# EAGLE board Tiny2313-1 (EAGLE 5.00)
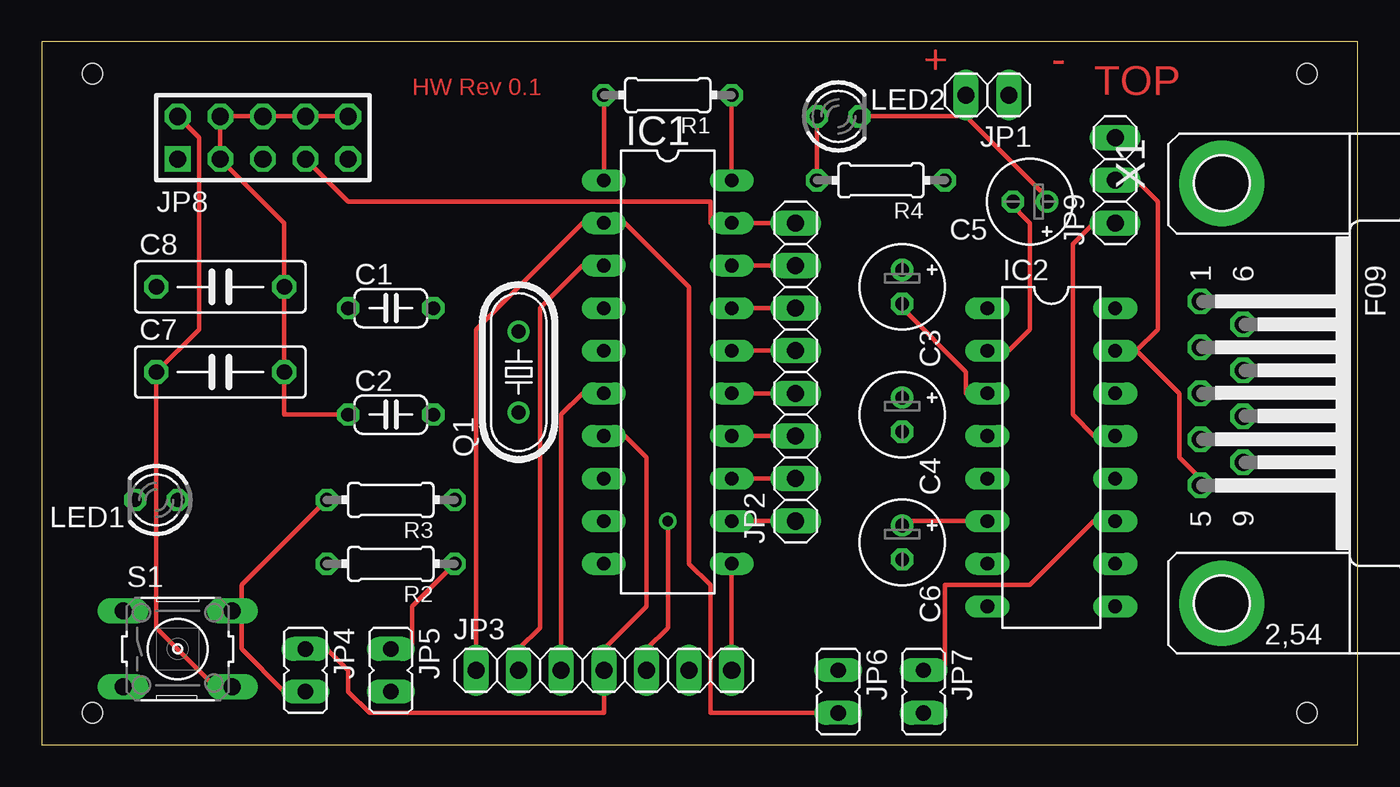
[diagram p0: board, top side]
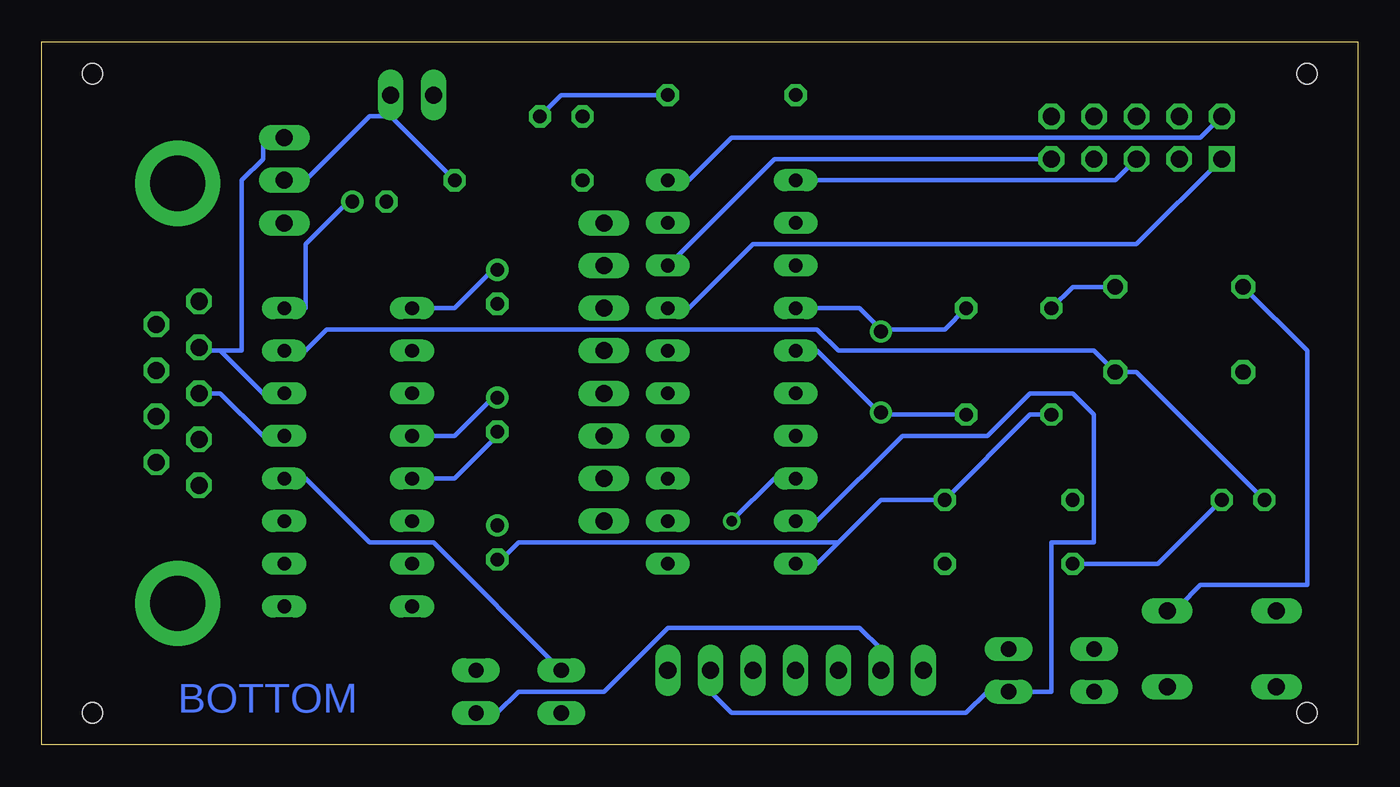
[diagram p1: board, bottom side, seen from below]

Size 78.41 x 41.9 mm. Coordinates in mm from the lower left corner, seen from the top.
Outline: 0,0 78.41,0 78.41,41.9 0,41.9 0,0
Copper layers (1*16): Top 0.035mm / dielectric 1.5mm / Bottom 0.035mm
Design rules "default": minimum track width 10mil, minimum drill 24mil, track to track 8mil, track to pad 8mil, pad to pad 8mil, via to via 8mil, smd to smd 8mil, copper to edge 40mil, drill to drill 8mil, minimum pad ring 10mil, minimum via ring 8mil, stop-mask expansion 4mil, vias tented up to drill 0mil, thermal gap 10mil
Holes 1.2 mm at 3.01,40 3.01,1.9 75.4,1.9 75.4,40

## Footprints (pad centres in the part's own frame; a part is rotated, then mirrored left to right if it is on the bottom)
C050-024X044 = drill 0.813 octagon: 1 -2.54,0; 2 2.54,0
E2-5 = drill 0.813 pad 1.27 round: + -1.016,0 | drill 0.813 pad 1.27 octagon: - 1.016,0
C075-032X103 = drill 0.914 octagon: 1 -3.81,0; 2 3.81,0
DIL20 = drill 0.813 long: 1 -11.43,-3.81; 2 -8.89,-3.81; 3 -6.35,-3.81; 4 -3.81,-3.81; 5 -1.27,-3.81; 6 1.27,-3.81; 7 3.81,-3.81; 8 6.35,-3.81; 9 8.89,-3.81; 10 11.43,-3.81; 11 11.43,3.81; 12 8.89,3.81; 13 6.35,3.81; 14 3.81,3.81; 15 1.27,3.81; 16 -1.27,3.81; 17 -3.81,3.81; 18 -6.35,3.81; 19 -8.89,3.81; 20 -11.43,3.81
DIL16 = drill 0.813 long: 1 -8.89,-3.81; 2 -6.35,-3.81; 3 -3.81,-3.81; 4 -1.27,-3.81; 5 1.27,-3.81; 6 3.81,-3.81; 7 6.35,-3.81; 8 8.89,-3.81; 9 8.89,3.81; 10 6.35,3.81; 11 3.81,3.81; 12 1.27,3.81; 13 -1.27,3.81; 14 -3.81,3.81; 15 -6.35,3.81; 16 -8.89,3.81
1X02 = drill 1.016 long: 1 -1.27,0; 2 1.27,0
1X08 = drill 1.016 long: 1 -8.89,0; 2 -6.35,0; 3 -3.81,0; 4 -1.27,0; 5 1.27,0; 6 3.81,0; 7 6.35,0; 8 8.89,0
1X07 = drill 1.016 long: 1 -7.62,0; 2 -5.08,0; 3 -2.54,0; 4 0,0; 5 2.54,0; 6 5.08,0; 7 7.62,0
JP1 = drill 0.914 long: 1 0,-1.27; 2 0,1.27
AVR-ISP-10 = drill 1.016 square: 1 -5.08,-1.27 | drill 1.016 octagon: 2 -5.08,1.27; 3 -2.54,-1.27; 4 -2.54,1.27; 5 0,-1.27; 6 0,1.27; 7 2.54,-1.27; 8 2.54,1.27; 9 5.08,-1.27; 10 5.08,1.27
1X03 = drill 1.016 long: 1 -2.54,0; 2 0,0; 3 2.54,0
LED3MM = drill 0.813 octagon: A -1.27,0; K 1.27,0
HC49/S = drill 0.813 round: 1 -2.413,0; 2 2.413,0
0204/7 = drill 0.813 octagon: 1 -3.81,0; 2 3.81,0
B3F-10XX = drill 1.016 long: 1 -3.251,2.261; 2 3.251,2.261; 3 -3.251,-2.261; 4 3.251,-2.261
F09HP = drill 1.016 octagon: 1 -5.486,-1.27; 2 -2.743,-1.27; 3 0,-1.27; 4 2.743,-1.27; 5 5.486,-1.27; 6 -4.115,1.27; 7 -1.372,1.27; 8 1.372,1.27; 9 4.115,1.27 | drill 3.302 pad 5.08 round: G1 -12.522,0; G2 12.522,0

## Placement (x,y rotation side)
C1  22p  [C050-024X044]  20.79,26.03 0 top
C2  22p  [C050-024X044]  20.79,19.68 0 top
C3  4,7uF  [E2-5]  51.27,27.3 270 top
C4  4,7uF  [E2-5]  51.27,19.68 270 top
C5  4,7uF  [E2-5]  58.89,32.38 180 top
C6  4,7uF  [E2-5]  51.27,12.06 270 top
C7  100n  [C075-032X103]  10.63,22.22 0 top
C8  330n  [C075-032X103]  10.63,27.3 0 top
IC1  AT-Tiny-2313  [DIL20]  37.3,22.22 270 top
IC2  MAX232  [DIL16]  60.16,17.14 270 top
JP1  [1X02]  56.35,38.73 180 top
JP2  [1X08]  44.92,22.22 90 top
JP3  [1X07]  33.49,4.44 0 top
JP4  [JP1]  15.71,4.44 180 top
JP5  [JP1]  20.79,4.44 180 top
JP6  [JP1]  47.46,3.17 180 top
JP7  [JP1]  52.54,3.17 180 top
JP8  AVR-ISP-10  [AVR-ISP-10]  13.17,36.19 0 top
JP9  [1X03]  63.97,33.65 90 top
LED1  gn  [LED3MM]  6.82,14.6 180 top
LED2  rt  [LED3MM]  47.46,37.46 0 top
Q1  16 MHz  [HC49/S]  28.41,22.22 90 top
R1  10k  [0204/7]  37.3,38.73 180 top
R2  270  [0204/7]  20.79,10.79 180 top
R3  33k  [0204/7]  20.79,14.6 180 top
R4  270  [0204/7]  50,33.65 180 top
S1  [B3F-10XX]  8.09,5.71 0 top
X1  [F09HP]  70.32,20.95 270 top

## Library data of the parts
C1-C8 R1-R4 = rcl
IC1 = avr-4
IC2 = maxim
JP1-JP3 JP9 = pinhead
JP4-JP7 = jumper
JP8 = atmel
LED1 LED2 = led
Q1 = crystal
S1 = switch-omron
X1 = con-subd

## Nets
+5V: C5.+ C7.1 IC1.20 IC2.16 JP1.2 JP8.2 LED2.K R1.1 S1.4
GND: C1.1 C2.1 C6.- C7.2 C8.2 IC1.10 IC2.15 JP1.1 JP8.3 JP8.4 JP8.6 JP8.8 JP8.10 JP9.2 LED1.K R3.1 R4.1 X1.5
N$1: C1.2 IC1.4 Q1.2
N$2: C2.2 IC1.5 Q1.1
N$3: IC1.1 JP8.5 R1.2
N$8: C3.+ IC2.1
N$9: C3.- IC2.3
N$10: C4.+ IC2.4
N$11: C4.- IC2.5
N$12: C5.- IC2.2
N$13: C6.+ IC2.6
N$16: IC2.14 JP9.3 X1.2
N$17: IC2.13 JP9.1 X1.3
N$18: LED1.A R2.2
N$19: C8.1 JP4.2 R3.2 S1.2
N$28: JP5.1 R2.1
N$30: LED2.A R4.2
N$31: IC2.11 JP7.1
N$32: IC2.12 JP6.1
PB0: IC1.12 JP2.1
PB1: IC1.13 JP2.2
PB2: IC1.14 JP2.3
PB3: IC1.15 JP2.4
PB4: IC1.16 JP2.5
PB5: IC1.17 JP2.6 JP8.1
PB6: IC1.18 JP2.7 JP8.9
PB7: IC1.19 JP2.8 JP8.7
PD0: IC1.2 JP3.1 JP6.2
PD1: IC1.3 JP3.2 JP7.2
PD2: IC1.6 JP3.3
PD3: IC1.7 JP3.4 JP4.1
PD4: IC1.8 JP3.5
PD5: IC1.9 JP3.6 JP5.2
PD6: IC1.11 JP3.7

## Tracks (layer width: path | path; a pad name or v marks a point on that pad's centre or on a via)
+5V
  Top 0.254: IC1.20 R1.1 | JP8.2 9.36,36.19 9.36,24.76 C7.1 6.82,6.98 10.63,3.17 S1.4 | LED2.K 55.08,37.46 | 55.08,37.46 60.16,32.38 C5.+ | 55.08,37.46 JP1.2
  Bottom 0.254: JP8.2 9.36,36.19 37.3,36.19 39.84,33.65 IC1.20 | IC2.16 62.7,26.03 62.7,29.84 60.16,32.38 C5.+ | LED2.K 47.46,38.73 R1.1
GND
  Top 0.254: JP8.10 JP8.8 JP8.6 JP8.4 JP8.3 14.44,31.11 C8.2 C7.2 14.44,19.68 C2.1 | 65.24,23.49 67.78,20.95 67.78,17.14 69.05,15.87 X1.5 | 65.24,23.49 66.51,24.76 66.51,32.38 65.24,33.65 JP9.2 | IC2.15 65.24,23.49
  Bottom 0.254: C1.1 16.98,27.3 C8.2 | LED1.K 13.17,22.22 C7.2 15.71,23.49 30.95,23.49 32.22,24.76 61.43,24.76 62.7,23.49 IC2.15 | C2.1 19.52,19.68 R3.1 28.41,14.6 30.95,12.06 | 30.95,12.06 32.22,10.79 IC1.10 | 30.95,12.06 50,12.06 51.27,10.79 C6.- | 57.62,37.46 R4.1 | 57.62,37.46 58.89,37.46 62.7,33.65 JP9.2 | 57.62,37.46 JP1.1
N$1
  Bottom 0.254: 28.41,24.76 29.68,26.03 IC1.4 | C1.2 24.6,24.76 28.41,24.76 | 28.41,24.76 Q1.2
N$2
  Bottom 0.254: C2.2 28.41,19.68 | 28.41,19.68 32.22,23.49 IC1.5 | 28.41,19.68 Q1.1
N$3
  Top 0.254: IC1.1 R1.2
  Bottom 0.254: JP8.5 14.44,33.65 IC1.1
N$8
  Bottom 0.254: C3.+ 51.27,28.57 53.81,26.03 IC2.1
N$9
  Top 0.254: C3.- 51.27,26.03 55.08,22.22 55.08,20.95 IC2.3
N$10
  Bottom 0.254: C4.+ 51.27,20.95 53.81,18.41 IC2.4
N$11
  Bottom 0.254: C4.- 51.27,18.41 53.81,15.87 IC2.5
N$12
  Top 0.254: IC2.2 57.62,23.49 58.89,24.76 58.89,31.11 57.62,32.38 C5.-
N$13
  Top 0.254: C6.+ 51.27,13.33 IC2.6
N$16
  Bottom 0.254: 67.78,23.49 65.24,20.95 IC2.14 | 67.78,23.49 69.05,23.49 X1.2 | 67.78,23.49 66.51,23.49 66.51,33.65 65.24,34.92 65.24,36.19 JP9.3
N$17
  Top 0.254: JP9.1 62.7,31.11 61.43,29.84 61.43,19.68 62.7,18.41 IC2.13
  Bottom 0.254: X1.3 67.78,20.95 65.24,18.41 IC2.13
N$18
  Bottom 0.254: LED1.A 11.9,10.79 R2.2
N$19
  Top 0.254: R3.2 11.9,9.52 11.9,8.25 | 11.9,8.25 11.9,5.71 14.44,3.17 JP4.2 | S1.2 11.9,8.25
  Bottom 0.254: C8.1 3.01,23.49 3.01,9.52 9.36,9.52 10.63,8.25 S1.2
N$28
  Top 0.254: R2.1 22.06,8.25 22.06,5.71 JP5.1
N$30
  Top 0.254: R4.2 LED2.A
N$31
  Top 0.254: IC2.11 62.7,13.33 58.89,9.52 53.81,9.52 53.81,4.44 JP7.1
N$32
  Bottom 0.254: JP6.1 55.08,12.06 58.89,12.06 62.7,15.87 IC2.12
PB0
  Top 0.254: IC1.12 JP2.1
PB1
  Top 0.254: IC1.13 JP2.2
PB2
  Top 0.254: IC1.14 JP2.3
PB3
  Top 0.254: IC1.15 JP2.4
PB4
  Top 0.254: IC1.16 JP2.5
PB5
  Top 0.254: IC1.17 JP2.6
  Bottom 0.254: JP8.1 13.17,29.84 36.03,29.84 39.84,26.03 IC1.17
PB6
  Top 0.254: IC1.18 JP2.7
  Bottom 0.254: JP8.9 34.76,34.92 IC1.18
PB7
  Top 0.254: JP2.8 IC1.19 39.84,31.11 39.84,32.38 18.25,32.38 JP8.7
PD0
  Top 0.254: JP3.1 25.87,24.76 32.22,31.11 IC1.2 34.76,31.11 38.57,27.3 38.57,10.79 39.84,9.52 39.84,1.9 JP6.2
PD1
  Top 0.254: IC1.3 32.22,28.57 29.68,26.03 29.68,6.98 28.41,5.71 JP3.2
  Bottom 0.254: JP7.2 51.27,1.9 50,3.17 44.92,3.17 41.11,6.98 29.68,6.98 28.41,5.71 JP3.2
PD2
  Top 0.254: IC1.6 32.22,20.95 30.95,19.68 JP3.3
PD3
  Top 0.254: IC1.7 34.76,18.41 36.03,17.14 36.03,8.25 33.49,5.71 JP3.4 33.49,1.9 19.52,1.9 18.25,3.17 18.25,4.44 16.98,5.71 JP4.1
PD4  (via drill 0.61)
  Top 0.254: v37.3,13.33 37.3,6.98 36.03,5.71 JP3.5
  Bottom 0.254: v37.3,13.33 34.76,15.87 IC1.8
PD5
  Bottom 0.254: IC1.9 32.22,13.33 27.14,18.41 22.06,18.41 19.52,20.95 16.98,20.95 15.71,19.68 15.71,12.06 18.25,12.06 18.25,3.17 JP5.2 22.06,3.17 23.33,1.9 37.3,1.9 38.57,3.17 JP3.6
PD6
  Top 0.254: JP3.7 IC1.11

## Text on the board
Top: + | - | HW Rev 0.1 | TOP
Bottom: BOTTOM